# Altium PCB STM32F030C8T6_PCB_2.0.pcbdoc
Units mil, origin at the board's own origin, x right, y up, seen from the top; angles counter-clockwise.
Board outline 1897.64 x 905.51 mil, 2 copper layers (Top Layer, Bottom Layer); 30 components, 50 nets, 157 pads, 23 vias.
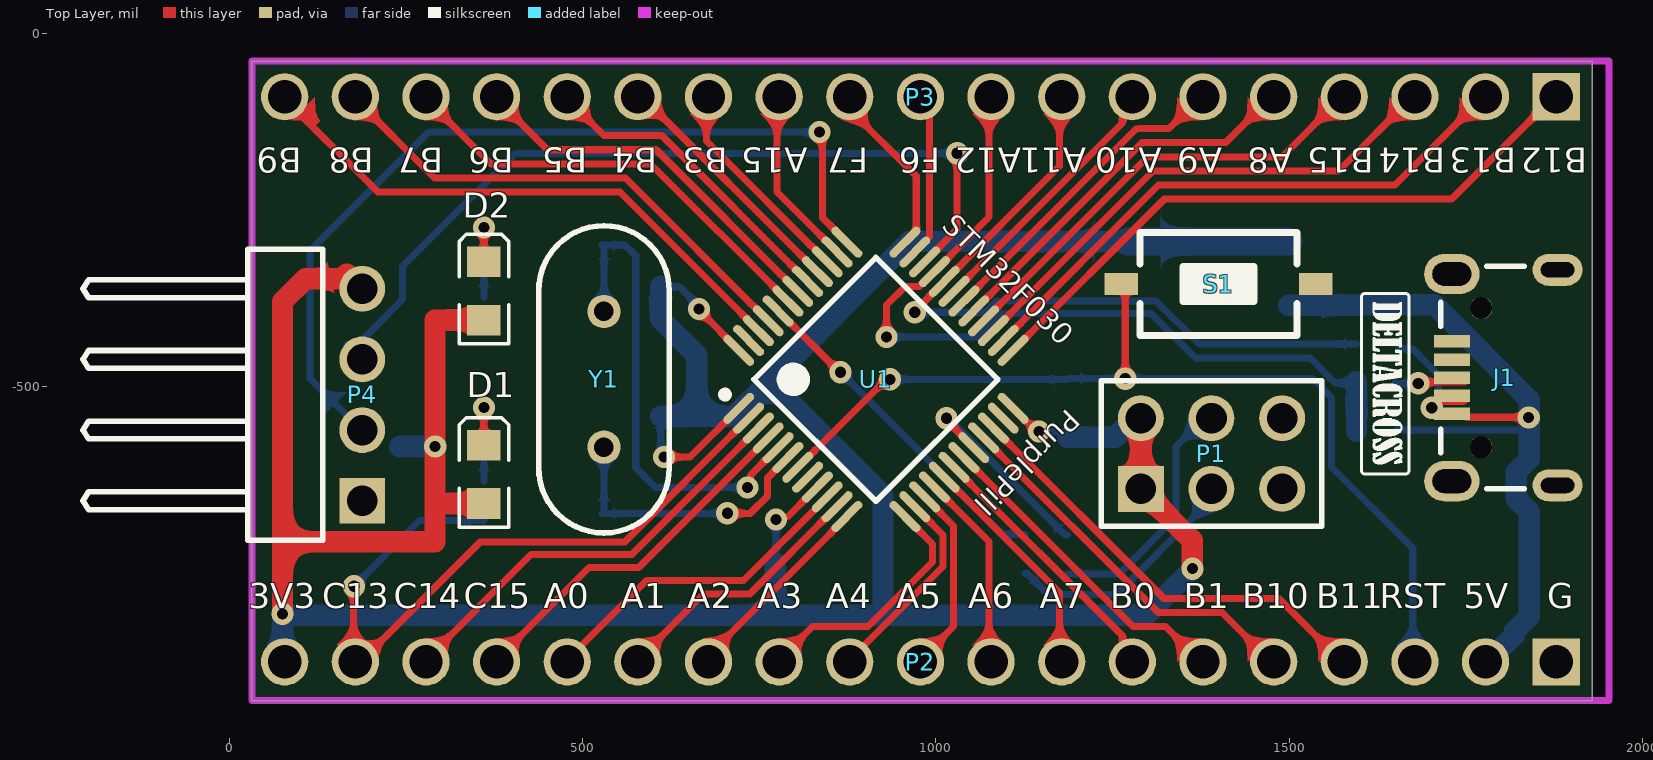
[diagram p0: Top Layer view]
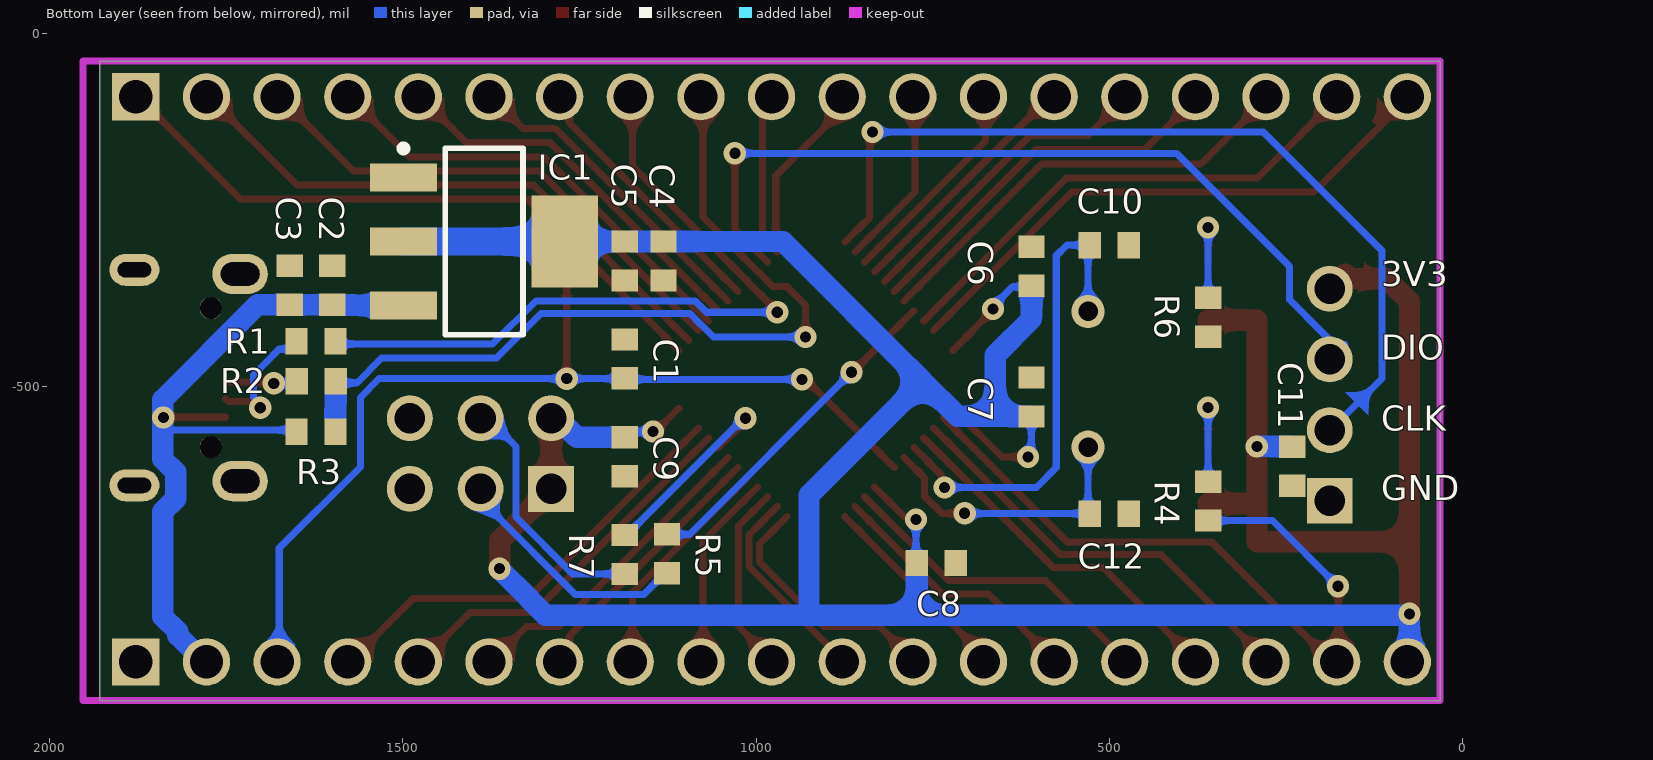
[diagram p1: Bottom Layer view, seen from below]
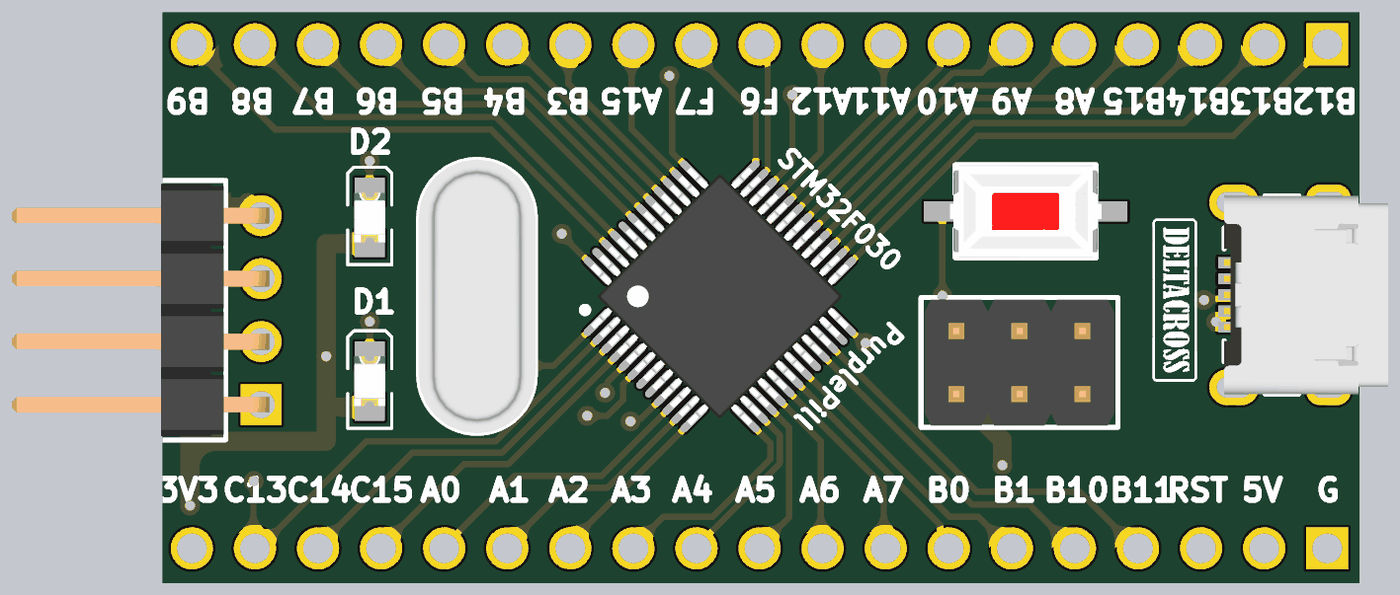
[diagram p2: 3D render of the assembled board from above, using the file's embedded part models]

## Layer stack, top to bottom
Top Solder: solder mask 0.4, Solder Resist, Dk 3.5
Top Layer: signal copper 1.4
Dielectric 1: dielectric 12.6, FR-4, Dk 4.8
Bottom Layer: signal copper 1.4
Bottom Solder: solder mask 0.4, Solder Resist, Dk 3.5

## Board outline
31.5,-944.88 1929.13,-944.88 1929.13,-39.37 31.5,-39.37

## Design rules (kind name [scope] priority, off if disabled: settings)
Clearance [All] p1: gap=8 ignorepadtopadclearanceinfootprint=FALSE
PolygonConnect [All] p1: connectstyle=Relief reliefconductorwidth=10 reliefentries=4 polygonreliefangle="90 Angle" airgapwidth=10
RoutingVias [All] p1: holewidth=15.75 width=31.5 viastyle="Through Hole" minholewidth=15.75 minwidth=31.5 maxholewidth=15.75 maxwidth=31.5
SolderMaskExpansion [All] p1: expansion=4 istentingtop=FALSE
Width [All] p1: maxlimit=50 minlimit=10 preferedwidth=30
30 further rules are at their usual default settings.

## Components (designator, comment, footprint, x,y, rotation, side; value= is the part's Value field where it differs from the comment)
C1 "C1" CAP-SM-0603 1186,-461.04 r90 bottom value=100pF (schematic designator C24)
C2 "C2" CAP-SM-0603 1600,-356.93 r270 bottom value=100pF (schematic designator C20)
C3 "C3" CAP-SM-0603 1660,-356.93 r90 bottom value=LM317 (schematic designator IC2)
C4 "C12" CAP-SM-0603 1131,-322.56 r90 bottom value=100pF (schematic designator C16)
C5 "C5" CAP-SM-0603 1186,-322.56 r270 bottom value=100pF (schematic designator C21)
C6 "C6" CAP-SM-0603 610,-330 r270 bottom value=100pF (schematic designator C23)
C7 "C7" CAP-SM-0603 610,-515 r270 bottom (schematic designator D4)
C8 "C8" CAP-SM-0603 745,-750 r0 bottom value=100pF (schematic designator C18)
C9 "C9" CAP-SM-0603 1186,-599.52 r90 bottom value=100pF (schematic designator C17)
C10 "C10" CAP-SM-0603 500,-300 r0 bottom value=100pF (schematic designator C22)
C11 "C11" CAP-SM-0603 241,-613 r90 bottom value=100pF (schematic designator C19)
C12 "C12" CAP-SM-0603 500,-680 r0 bottom (schematic designator D3)
D1 "D1" LED_0805_Blue 360,-624.47 r90 top (schematic designator P5)
D2 "D2" LED_0805_Blue 360,-364.78 r90 top (schematic designator J2)
IC1 "IC1" SOT223-4N 1385,-295 r180 bottom (schematic designator S2)
J1 "J1" 629105150521 1844.57,-487.56 r90 top value=100pF (schematic designator C15)
P1 "P1" 61300621121 1390,-595 r0 top value=100pF (schematic designator C14)
P2 "P2" PCBComponent_1 1878,-890 r90 top locked (schematic designator P7)
P3 "P3" PCBComponent_1 1878,-90 r90 top locked (schematic designator P8)
P4 "P4" 61300411021 78.74,-511.81 r270 top value=100nF (schematic designator C13)
R1 "R1" RES-SM-0603 1650,-436 r180 bottom value=1K (schematic designator R11)
R2 "R2" RES-SM-0603 1649.56,-493 r180 bottom value=1K (schematic designator R8)
R3 "R3" RES-SM-0603 1650,-564 r180 bottom value=1K (schematic designator R13)
R4 "R4" RES-SM-0603 360,-635.44 r270 bottom value=1K (schematic designator R12)
R5 "R5" RES-SM-0603 1126,-710 r270 bottom value=1K (schematic designator R14)
R6 "R6" RES-SM-0603 360,-375 r270 bottom value=1K (schematic designator R10)
R7 "R7" RES-SM-0603 1186,-765 r90 bottom value=1K (schematic designator R9)
S1 "S1" SW-SMD 1400,-355 r180 top (schematic designator U2)
U1 "U1" LQPF48 915,-490 r45 top (schematic designator P6)
Y1 "Y1" WE-XTAL_HC49/4H 530,-490 r270 top (schematic designator Y2)

## Footprints (in the part's own frame and the unit in brackets; to place one, negate y for a bottom-side part, rotate by r counter-clockwise, add the part's x,y. Pads: shape width x height; smd on the part's side, far side on the other; paste and mask are expansions set on the pad)
61300411021 [mm] "Pin Header, pitch 2.54 mm, THT, Angled, single row, 4p"
  rect 1.65x1.65 hole 1.1: 1(3.81,2.77)
  round 1.65 hole 1.1: 2(1.27,2.77) 3(-1.27,2.77) 4(-3.81,2.77)
  silkscreen extent -5.23,-7.27 5.23,1.35, body extent -5.08,-7.27 5.08,3.09, height 2.58
61300621121 [mm] "Pin Header, pitch 2.54 mm, THT, Vertical, dual row, 6p"
  rect 1.65x1.65 hole 1.1: 1(-2.54,-1.27)
  round 1.65 hole 1.1: 2(-2.54,1.27) 3(0,-1.27) 4(0,1.27) 5(2.54,-1.27) 6(2.54,1.27)
  silkscreen extent -3.96,-2.62 3.96,2.62, body extent -3.81,-2.54 3.81,2.54, height 8.59
629105150521 [mm] "Micro USB 2.0 SMT Type B Horizontal 5 Contacts High Current"
  rect 0.45x1.3 smd: 1(-1.3,2.9) 2(-0.65,2.9) 3(0,2.9) 4(0.65,2.9) 5(1.3,2.9)
  round 0.8 hole 0.8 unplated: MH1(-2.5,1.85) MH2(2.5,1.85)
  oval 1.15x1.8 hole 0.55 slot 1.2 at 90 deg: Shell(-3.875,-0.9) Shell(3.875,-0.9)
  oval 1.45x2 hole 0.85 slot 1.4 at 90 deg: Shell(-3.725,2.9) Shell(3.725,2.9)
  silkscreen extent -4,0.3 4,3.3, body extent -4,-3.3 4,3.3, height 2.75
CAP-SM-0603 [mm] "SMD Ceramic Capacitor Size 0603"
  rect 0.8x0.95 smd: 1(-0.7,0) 2(0.7,0)
  body extent -0.85,-0.45 0.85,0.45, height 0.6
LED_0805_Blue [mm] "Chip LED, 2-Leads, Body 2.0x1.3mm, IPC Medium Density"
  rect 1.1x1.2 smd: 1(-1.05,0) 2(1.05,0)
  silkscreen extent -1.91,-0.89 2.03,0.89, body extent -1,-0.63 1,0.62, height 0.68
LQPF48 [mm] "TSQFP, 48-Leads, Body 7.00x7.00mm, Pitch 0.50mm, IPC Medium Density"
  oval 1.45x0.3 smd: 1(-4.225,2.75) 2(-4.225,2.25) 3(-4.225,1.75) 4(-4.225,1.25) 5(-4.225,0.75) 6(-4.225,0.25) 7(-4.225,-0.25) 8(-4.225,-0.75) 9(-4.225,-1.25) 10(-4.225,-1.75) 11(-4.225,-2.25) 12(-4.225,-2.75) 25(4.225,-2.75) 26(4.225,-2.25) 27(4.225,-1.75) 28(4.225,-1.25) 29(4.225,-0.75) 30(4.225,-0.25) 31(4.225,0.25) 32(4.225,0.75) 33(4.225,1.25) 34(4.225,1.75) 35(4.225,2.25) 36(4.225,2.75)
  oval 0.3x1.45 smd: 13(-2.75,-4.225) 14(-2.25,-4.225) 15(-1.75,-4.225) 16(-1.25,-4.225) 17(-0.75,-4.225) 18(-0.25,-4.225) 19(0.25,-4.225) 20(0.75,-4.225) 21(1.25,-4.225) 22(1.75,-4.225) 23(2.25,-4.225) 24(2.75,-4.225) 37(2.75,4.225) 38(2.25,4.225) 39(1.75,4.225) 40(1.25,4.225) 41(0.75,4.225) 42(0.25,4.225) 43(-0.25,4.225) 44(-0.75,4.225) 45(-1.25,4.225) 46(-1.75,4.225) 47(-2.25,4.225) ""(-2.75,4.225)
  silkscreen extent -4.35,-3.1 3.1,3.57, body extent -4.5,-4.5 4.5,4.5, height 1.6
PCBComponent_1 [mm]
  rect 1.7x1.7 hole 1.2: 1(0,0)
  round 1.7 hole 1.2: 2(0,2.54) 3(0,5.08) 4(0,7.62) 5(0,10.16) 6(0,12.7) 7(0,15.24) 8(0,17.78) 9(0,20.32) 10(0,22.86) 11(0,25.4) 12(0,27.94) 13(0,30.48) 14(0,33.02) 15(0,35.56) 16(0,38.1) 17(0,40.64) 18(0,43.18) 19(0,45.72)
RES-SM-0603 [mm]
  rect 0.8x0.95 smd: 1(-0.014,0) 2(1.386,0)
  body extent -0.11,-0.4 1.49,0.4, height 0.3
SOT223-4N [mm] "SOT223, 4-Leads, Body 6.5x3.5mm, Pitch 2.3mm, Lead Span 7mm, IPC Medium Density"
  rect 2.4x1 smd: 1(-2.9,2.3) 2(-2.9,0) 3(-2.9,-2.3)
  rect 2.4x3.3 smd: 4(2.9,0)
  silkscreen extent -3.03,-3.35 1.4,3.47, body extent -3.39,-3.27 3.5,3.23, height 1.72
SW-SMD [mm] "Switch SMD type"
  rect 1.2x0.8 smd: 1(-3.5,0) 2(3.5,0)
  silkscreen extent -2.82,-1.85 2.82,1.85, body extent -3.05,-1.85 3.05,1.85, height 2.5
WE-XTAL_HC49/4H [mm] "Quartz Crystal, size HC49/4H, body 11.05x4.7mm"
  round 1.2 hole 0.7: 1(-2.44,0) 2(2.44,0)
  silkscreen extent -5.53,-2.35 5.53,2.35, body extent -5.52,-2.35 5.53,2.35, height 4.15

## Part data
C1 C2 C4 C5 C6 C8 C9 C10 C11 J1 P1 P4: library part "Cap Non-Pol SMD", "Capacitor"
C3: library part LM1117, "Available in 1.8V, 2.5V, 2.85V, 3.3V, 5V, and  Adjustable Versions"
C7 C12: library part "LED SMD", "LED"
D1: library part 61300621121, "WR-PHD Pin Header, THT, pitch 2.54mm, Dual Row, Vertical, 6p", Contact Resistance=20mOhm, Manufacturer="Wurth Elektronik", Operating Temperature="-40 to +105degC", Rated Current=3A, Withstanding Voltage=500VAC, Working Voltage=250VAC, ComponentLink1Description=Manufacturer, ComponentLink1URL=http://www.we-online.de, ComponentLink2Description=Datasheet, ComponentLink2URL=https://www.we-online.com/catalog/datasheet/61300621121.pdf, Gender="Pin Header", Manufacturer Part Number=61300621121, Mounting Technology=THT, Orientation=Vertical, Packaging=Bag, Pin Number=6, Pitch=2.54mm, Published Date="May 2020", Row Number=Dual
D2: library part 629105150521, "Micro USB 2.0 Type B Receptacle WR-COM, Horizontal, SMT, with Pegs, High Current at Pin 1 & Pin 5", Contact Resistance="30 mOhm", Operating Temperature="-40 to 85 degC", Rated Current="3 A", Working Voltage="30 VAC", ComponentLink1Description=Manufacturer, ComponentLink1URL=http://www.we-online.de, ComponentLink2Description=Datasheet, ComponentLink2URL=https://katalog.we-online.de/em/datasheet/629105150521.pdf, Connector Type="Micro USB 2.0 Type B", Gender=Receptacle, Mounting Technology=SMT, Orientation=Horizontal, Packaging="Tape and Reel", Part Number=629105150521, Published Date="September 2018", Publisher="Wurth Elektronik"
IC1: library part "Tact SW - 2Pin", "Switch button 2 pin"
P2 U1: library part Header_19
P3: library part 61300411021, "WR-PHD Pin Header, THT, pitch 2.54mm, Single Row, Angled, 4p", Contact Resistance=20mOhm, Manufacturer="Wurth Elektronik", Operating Temperature="-40 to +105degC", Rated Current=3A, Withstanding Voltage=500VAC, Working Voltage=250VAC, ComponentLink1Description=Manufacturer, ComponentLink1URL=http://www.we-online.de, ComponentLink2Description=Datasheet, ComponentLink2URL=https://www.we-online.com/catalog/datasheet/61300411021.pdf, Gender="Pin Header", Manufacturer Part Number=61300411021, Mounting Technology=THT, Orientation=Angled, Packaging=Bag, Pin Number=4, Pitch=2.54mm, Published Date="May 2020", Row Number=Single
R1 R2 R3 R4 R5 R6 R7: library part "RESISTOR SMD", "Resistor"
S1: library part STM32F030C8T6, "IC MCU 32BIT 64KB FLASH 48LQFP"
Y1: library part 830003156B, "WE-XTAL Quartz Crystal, THT, HC49/4H, 8MHz, +/-30ppm", Frequency=8MHz, Frequency Stability=+/-50ppm, Frequency Tolerance=+/-30ppm, Load Capacitance=30pF, Manufacturer="Wurth Elektronik", Operating Temperature="-20 to +70degC", ComponentLink1Description=Manufacturer, ComponentLink1URL=http://www.we-online.de, ComponentLink2Description=Datasheet, ComponentLink2URL=https://katalog.we-online.com/pbs/datasheet/830003156B.pdf, Manufacturer Part Number=830003156B, Mounting Technology=THT, Packaging=Bulk, Published Date="July 2020", Size=HC49/4H

## Via types
v1: diameter 31.5, hole 15.75, Top Layer to Bottom Layer, tented both sides, 23 vias

## Nets (pads, with @x,y where several pads share a name; then routed paths per layer and width w, separated by ;. In a path a pad name is that pad's centre, name@x,y a point inside that pad or via, vN(x,y) a via of type N, cw(c..) or ccw(c..) an arc to the next point about the centre after c; other vN are vias at no path point)
3V3: C4.2 C5.1 C6.2 C7.2 C8.2 C9.2 C11.2 D1.1 D2.1 IC1.2 IC1.4 P1.1 P1.2 P2.19 P4.4 U1. U1.1 U1.9 U1.24 | length 5225.7
  Top Layer w10: v1(615,-600) 651.89,-600 U1.1 ; v1(664.41,-390.59) 664.41,-392.04 720.82,-448.45 U1. ; 790.32,-684.28 U1.9 ; U1.24 1109.67,-531.06 1142.6,-564 v1(1146,-564)
  Top Layer w30: v1(75,-822) 75,-720 ; P4.4@166,-341 159.31,-347.69 107.31,-347.69 75,-380 75,-720 ; D1.1 291.81,-665.81 291,-665 ; D2.1 291,-406.12 v1(291,-585) 291,-665 ; P1.2 P1.1 1362.71,-717.71 1362.71,-757.71 v1(1363,-758) ; 75,-720 291,-720 291,-665
  Bottom Layer w10: C6.2 610.16,-357.71 611.44,-359 637,-359 664.41,-386.41 v1(664.41,-390.59) ; C7.2@610.16,-542.71 610.16,-594.71 v1@615,-599.56 ; v1@664.57,-390.43 v1@664.57,-388.18 ; C8.2@773.55,-749.07 v1@773.55,-688.55 ; v1(1146,-564) 1178.04,-564 C9.2
  Bottom Layer w30: P2.19@75,-890 v1@75,-834.38 ; v1@84.24,-824 772.56,-824 ; C11.2 241.75,-584.69 290.69,-584.69 v1(291,-585) ; C6.2@610.16,-357.71 610.16,-404.71 661.38,-455.93 661.38,-542.27 ; C7.2@610.29,-542.27 661.38,-542.27 ; C8.2 772.56,-824 ; C9.2 1253.58,-571.96 1280.54,-545 P1.2 ; IC1.4 C5.1 C4.2 961.8,-295 763.9,-492.9 ; v1(1363,-758) 1363,-758.4 1320.29,-801.12 1320.29,-801.71 1298,-824 923,-824 ; 1385.25,-294.81 1390.16,-299.71 ; 661.38,-542.27 714.52,-542.27 763.9,-492.9 ; 763.9,-492.9 925.16,-654.16 925.16,-821.84 923,-824 ; 772.56,-824 923,-824
  Bottom Layer w40: IC1.4@1271.11,-294.71 1384.9,-294.71 ; 1385.25,-294.81 IC1.2@1498.98,-294.81
  other v1: 773.39,-688.39
5V: C2.2 C3.1 IC1.3 J1.1 P2.2 R3.1 | length 1092.5
  Top Layer w10: J1.1@1750.83,-543.31 1751.17,-543.65 1838.65,-543.65 v1(1839,-544)
  Bottom Layer w10: R3.1 1652.76,-561.8 1840,-561.8
  Bottom Layer w30: IC1.3 1499.7,-385.02 1599.47,-385.02 C2.2 1705.49,-384.49 1840,-519 1840,-544 1840,-561.8 1840,-602.78 1821.57,-621.21 1821.57,-659.02 1840,-677.45 1840,-825.54 1818.54,-847.01 1818.54,-852.46 1781,-890 P2.2@1775,-890
BOOT0: R5.1 U1.44 | length 480.5
  Top Layer w10: U1.44 776.99,-393.26 863.73,-480 v1(865,-480)
  Bottom Layer w10: v1(865,-480) 1094.44,-709.44 R5.1
BOOT1: R7.2 U1.20 | length 297.2
  Top Layer w10: v1(1015,-545) 1015,-547.75 1053.5,-586.25 U1.20
  Bottom Layer w10: v1(1015,-545) 1017.61,-545 1183.05,-710.44 R7.2
CLK: P4.2 U1.37 | length 1217.1
  Top Layer w10: v1(835,-140) 839.11,-144.11 839.11,-261 U1.37
  Bottom Layer w10: P4.2@166,-541 114,-489 114,-308 282,-140 v1(835,-140)
DIO: P4.3 U1.34 | length 1176.5
  Top Layer w10: U1.34 1030,-277.56 v1(1030,-170)
  Bottom Layer w10: P4.3@166,-441 180.87,-441 196.95,-424.93 197.07,-424.93 245,-377 245,-330 405,-170 v1(1030,-170)
GND: C1.2 C2.1 C3.2 C4.1 C5.2 C6.1 C7.1 C8.1 C9.1 C10.1 C11.1 C12.1 IC1.1 J1.4 J1.5 P1.5 P1.6 P2.1 P4.1 R6.2 S1.1 U1.8 U1.23 U1.47
NetD1_2: D1.2 R4.1 | length 158
  Top Layer w10: D1.2 v1(360,-530)
  Bottom Layer w10: R4.1 v1(360,-530)
NetD2_2: D2.2 R6.1 | length 147.9
  Top Layer w10: D2.2 v1(360,-275)
  Bottom Layer w10: R6.1 v1(360,-275)
NetJ1_2: J1.2 R1.1 | length 185.6
  Top Layer w10: v1(1701.86,-530.25) 1707.68,-530.25 1716.48,-521.45 1747.09,-521.45 J1.2@1750.83,-517.72
  Bottom Layer w10: R1.1 1650.56,-436.5 1661.31,-447.25 1674.97,-447.25 1694.46,-466.74 1711.5,-483.77 1711.5,-514.79 1701.86,-524.43 v1(1701.86,-530.25)
NetJ1_3: J1.3 R2.1 | length 102.5
  Top Layer w10: v1(1682.75,-495.68) 1684.53,-493.9 1749.05,-493.9 J1.3@1750.83,-492.13
  Bottom Layer w10: R2.1@1650.12,-495 1650.8,-495.68 v1(1682.75,-495.68)
NetP1_3: P1.3 R5.2 | length 347.2
  Bottom Layer w10: R5.2 1128.95,-764.56 1158.7,-794.31 1256.15,-794.31 1379.48,-670.97 1379.48,-655.52 P1.3
NetP1_4: P1.4 R7.1 | length 353.9
  Bottom Layer w10: R7.1 1259.44,-765.56 1340,-685 1340,-585 1380,-545 P1.4
NRST: C1.1 P2.3 S1.2 U1.7 | length 1377.5
  Top Layer w10: U1.7 804.83,-614.58 929.41,-490 v1(935,-490) ; S1.2 1268,-360.8 v1(1268,-489)
  Bottom Layer w10: v1(935,-490) 1184.6,-490 C1.1 1186.4,-489 v1(1268,-489) 1533.54,-489 1560.17,-515.62 1560.17,-614.17 1675,-729 P2.3@1675,-890
OSC_IN: C10.2 U1.5 Y1.1 | length 692.5
  Top Layer w10: v1(733.03,-643.03) 737.14,-638.92 737.14,-626.1 U1.5
  Bottom Layer w10: Y1.1 530,-302.44 C10.2 560,-300 575,-315 575,-615 603.03,-643.03 v1(733.03,-643.03)
OSC_OUT: C12.2 U1.6 Y1.2 | length 402.2
  Top Layer w10: v1(704.64,-679.64) 737.07,-679.64 761.78,-654.94 761.78,-629.3 U1.6
  Bottom Layer w10: C12.2 704.28,-680 v1(704.64,-679.64) ; C12.2@530,-677.56 Y1.2
PA0: P2.15 U1.10 | length 467.9
  Top Layer w10: P2.15@475,-890 590,-775 727.44,-775 U1.10
PA1: P2.14 U1.11 | length 376
  Top Layer w10: P2.14@575,-890 671.1,-793.9 736.38,-793.9 U1.11
PA2: P2.13 U1.12 | length 288.2
  Top Layer w10: P2.13@675,-890 675,-883.6 873.94,-684.67 U1.12
PA3: P2.12 U1.13 | length 359.2
  Top Layer w10: P2.12@775,-890 825,-840 903.79,-840 995,-748.79 995,-723.11 U1.13
PA4: P2.11 U1.14 | length 292.2
  Top Layer w10: P2.11@875,-890 1010,-755 1010,-710.27 U1.14
PA5: P2.10 U1.15 | length 271.4
  Top Layer w10: P2.10@975,-890 1025,-840 1025,-697.44 U1.15
PA6: P2.9 U1.16 | length 279.6
  Top Layer w10: U1.16 1075,-719.6 P2.9@1075,-890
PA7: P2.8 U1.17 | length 329.1
  Top Layer w10: U1.17 1175,-791.76 P2.8@1175,-890
PA8: P3.5 U1.29 | length 547.1
  Top Layer w10: U1.29 1291.76,-155 1410,-155 P3.5@1475,-90
PA9: P3.6 U1.30 | length 455
  Top Layer w10: U1.30 1283.18,-135.74 ccw(c1275,-90) 1286.57,-135 1330,-135 P3.6@1375,-90
PA10: P3.7 U1.31 | length 378.7
  Top Layer w10: U1.31 1264.11,-126.97 1264.11,-100.89 P3.7@1275,-90
PA11: P3.8 R1.2 U1.32 | length 1047.4
  Top Layer w10: v1(970,-395) 970,-393.73 1011.74,-351.99 U1.32 1175,-188.24 P3.8@1175,-90
  Bottom Layer w10: v1(970,-395) 1070,-395 1086.13,-378.87 1311.7,-378.87 1372.83,-440 R1.2@1595.44,-440
PA12: P3.9 R2.2 R3.2 U1.33 | length 1202.9
  Top Layer w10: v1(930,-430) 930,-385 956.42,-358.58 976.34,-358.58 997.33,-337.58 U1.33 1075,-260.4 P3.9@1075,-90
  Bottom Layer w10: v1(930,-430) 1060,-430 1077,-413 1077.46,-413 1093.59,-396.87 1304.24,-396.87 1367.37,-460 1530,-460 1565,-495 R2.2@1595,-495
  Bottom Layer w30: R2.2@1595,-495 R2.2@1595.22,-495.22 ; R2.2 1595.22,-493.22 R2.2@1595.22,-495.22 ; R3.2 1595.22,-563.78 R2.2@1595.22,-495.22
PA15: P3.12 U1.38 | length 255
  Top Layer w10: P3.12@775,-90 775,-224.73 U1.38
PB0: P2.7 U1.18 | length 378.7
  Top Layer w10: U1.18 1264.11,-853.03 1264.11,-879.11 P2.7@1275,-890
PB1: P2.6 U1.19 | length 455.3
  Top Layer w10: U1.19 1278.92,-840 1325,-840 P2.6@1375,-890
PB3: P3.13 U1.39 | length 304.5
  Top Layer w10: P3.13@675,-90 675,-152.56 U1.39
PB4: P3.14 U1.40 | length 359.7
  Top Layer w10: P3.14@575,-90 584.11,-90 831.69,-337.58 U1.40
PB5: P3.15 U1.41 | length 451.6
  Top Layer w10: P3.15@475,-90 530,-145 611.76,-145 U1.41
PB6: P3.16 U1.42 | length 543.4
  Top Layer w10: P3.16@375,-90 450,-165 603.92,-165 U1.42
PB7: P3.17 U1.43 | length 635.3
  Top Layer w10: P3.17@275,-90 370,-185 596.08,-185 U1.43
PB8: P3.18 U1.45 | length 719
  Top Layer w10: P3.18@175,-90 290,-205 560.4,-205 U1.45
PB9: P3.19 U1.46 | length 810.8
  Top Layer w10: P3.19@75,-90 210,-225 552.56,-225 U1.46
PB10: P2.5 U1.21 | length 539
  Top Layer w10: U1.21 1314.6,-820 1405,-820 P2.5@1475,-890
PB11: P2.4 U1.22 | length 630.8
  Top Layer w10: U1.22 1322.44,-800 1485,-800 P2.4@1575,-890
PB12: P3.1 U1.25 | length 914.5
  Top Layer w10: U1.25 1323.11,-235 1730,-235 P3.1@1875,-90
PB13: P3.2 U1.26 | length 822.7
  Top Layer w10: U1.26 1315.27,-215 1650,-215 P3.2@1775,-90
PB14: P3.3 U1.27 | length 730.8
  Top Layer w10: U1.27 1307.44,-195 1570,-195 P3.3@1675,-90
PB15: P3.4 U1.28 | length 639
  Top Layer w10: U1.28 1299.6,-175 1490,-175 P3.4@1575,-90
PC13: P2.18 R4.2 U1.2 | length 1042.7
  Top Layer w10: v1(176,-783) 175.5,-783.5 175.5,-889.5 175,-890 185,-890 354.78,-720.22 559.5,-720.22 U1.2
  Bottom Layer w10: P2.18@175,-890 P2.18@184.36,-890 ; v1(176,-783) 269,-690 R4.2 R4.2@359.47,-690.53
PC14: P2.17 U1.3 | length 610.8
  Top Layer w10: P2.17@275,-890 426.78,-738.22 569.34,-738.22 U1.3
PC15: P2.16 U1.4 | length 519
  Top Layer w10: P2.16@375,-890 508.78,-756.22 579.18,-756.22 U1.4
PF6: P3.10 U1.35 | length 235.1
  Top Layer w10: U1.35 969.98,-309.25 990.98,-288.26 990.98,-121.38 975,-105.4 P3.10@975,-90
PF7: P3.11 U1.36 | length 252.7
  Top Layer w10: P3.11@875,-90 875,-105 972.07,-202.07 972.07,-279.82 U1.36
pads on no net: J1.MH1 J1.MH2 J1.Shell

## Keep-outs
Keep-Out Layer:
  lines w10: 31.5,-944.88 1952.76,-944.88 1952.76,-39.37 31.5,-39.37 31.5,-944.88

## Silkscreen, mask and mechanical layers (free items; w line width, h text height)
Top Overlay:
  drawing of 11 lines, arcs and shapes, not listed
  text "B9" at 102.16,-162 h35 r180
  text "B8" at 204.16,-162 h35 r180
  text "B7" at 302.16,-162 h35 r180
  text "B6" at 402.16,-162 h35 r180
  text "B5" at 506.16,-162 h35 r180
  text "B5" at 506.16,-162 h35 r180
  text "B4" at 605.16,-162 h35 r180
  text "B3" at 705.16,-162 h35 r180
  text "A15" at 818.74,-162 h35 r180
  text "F7" at 904.16,-162 h35 r180
  text "F6" at 1006.16,-162 h35 r180
  text "A12" at 1120.74,-162 h35 r180
  text "A11" at 1212.9,-162 h35 r180
  text "A10" at 1319.74,-162 h35 r180
  text "A9" at 1405.16,-162 h35 r180
  text "A8" at 1505.16,-162 h35 r180
  text "B15" at 1619.74,-162 h35 r180
  text "B14" at 1720.74,-162 h35 r180
  text "B13" at 1821.74,-162 h35 r180
  text "B12" at 1921.74,-162 h35 r180
  text "STM32F030" at 1007.06,-274.16 h30 r315
  text "PurplePill" at 1185.68,-530.36 h30 r225
  text "3V3" at 27.35,-814 h35
  text "C13" at 131.26,-814 h35
  text "C14" at 232.26,-814 h35
  text "C15" at 331.26,-814 h35
  text "A0" at 444.84,-814 h35
  text "A1" at 553.67,-814 h35
  text "A2" at 647.84,-814 h35
  text "A3" at 746.84,-814 h35
  text "A4" at 843.84,-814 h35
  text "A5" at 943.84,-814 h35
  text "A6" at 1045.84,-814 h35
  text "A7" at 1146.84,-814 h35
  text "B0" at 1246.84,-814 h35
  text "B1" at 1350.67,-814 h35
  text "B10" at 1433.26,-814 h35
  text "B11" at 1538.1,-814 h35
  text "RST" at 1628.35,-814 h35
  text "5V" at 1746.84,-814 h35
  text "G" at 1865.34,-814 h35
Bottom Overlay:
  text "3V3" at 114.65,-358 h35
  text "DIO" at 114.65,-462 h35
  text "CLK" at 114.65,-563 h35
  text "GND" at 114.65,-661 h35

## Text inside footprints (layer, text, board x,y; h text height)
J1: Mechanical 2 "C12" at 1974.49,-538.74 h35 r90
Y1: Mechanical 11 "C12" at 500.47,-391.57 h35 r270